# Altium PCB Sensor_Box_Hub_SAMD21.PCBDOC (part 1 of 3)
Units mm, origin at the board's own origin, x right, y up, seen from the top; angles counter-clockwise.
Board outline 33.7 x 72.8 mm, 2 copper layers (Top, Bot), stack 1.571 mm thick; 108 components, 111 nets, 446 pads, 221 vias.
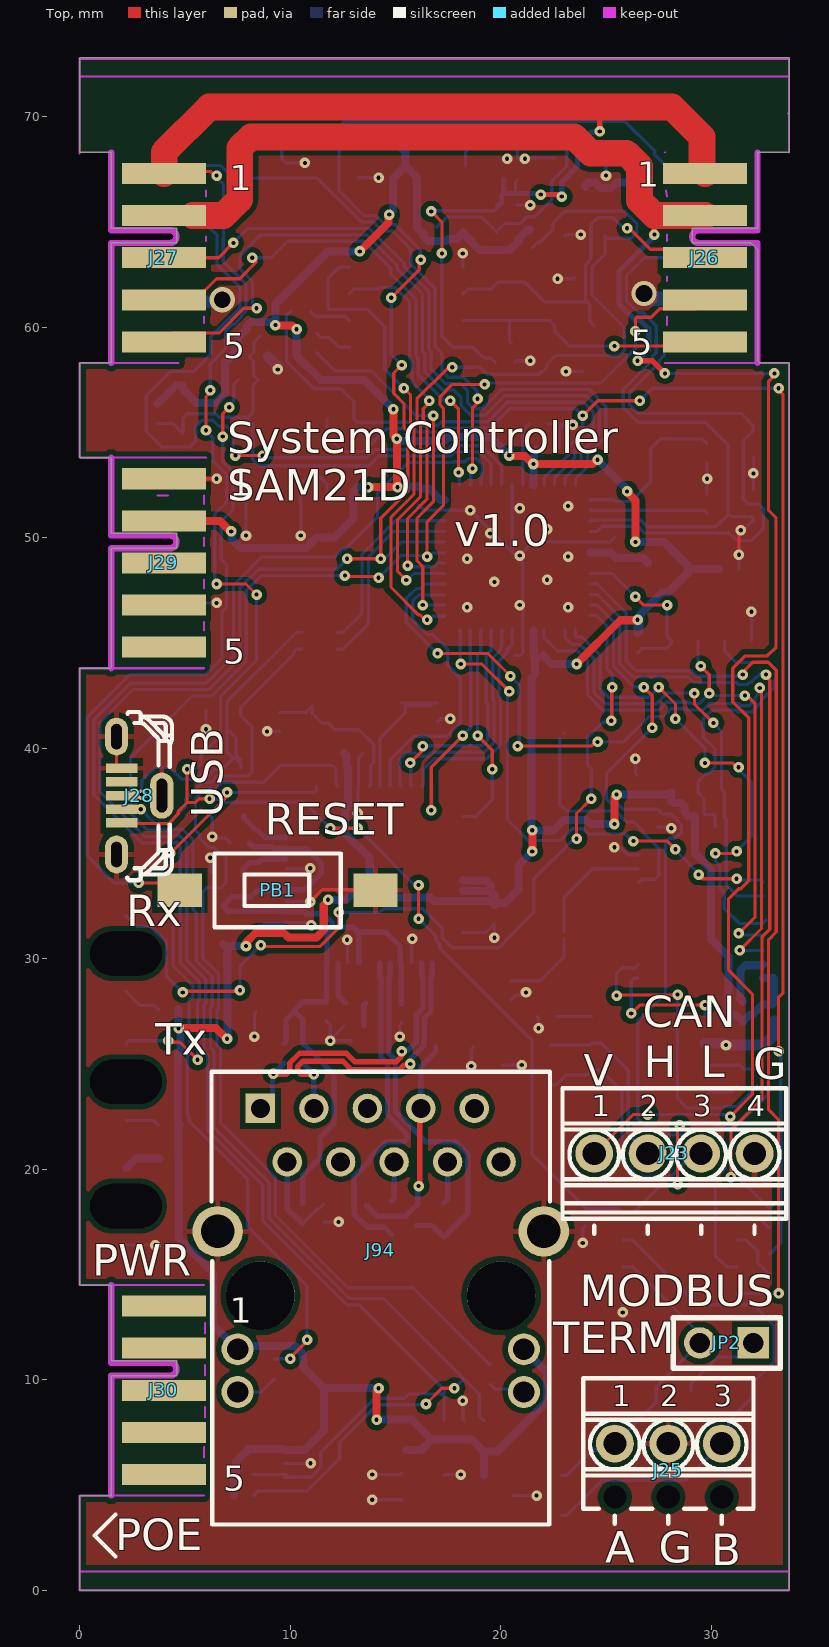
[diagram p0: Top view]
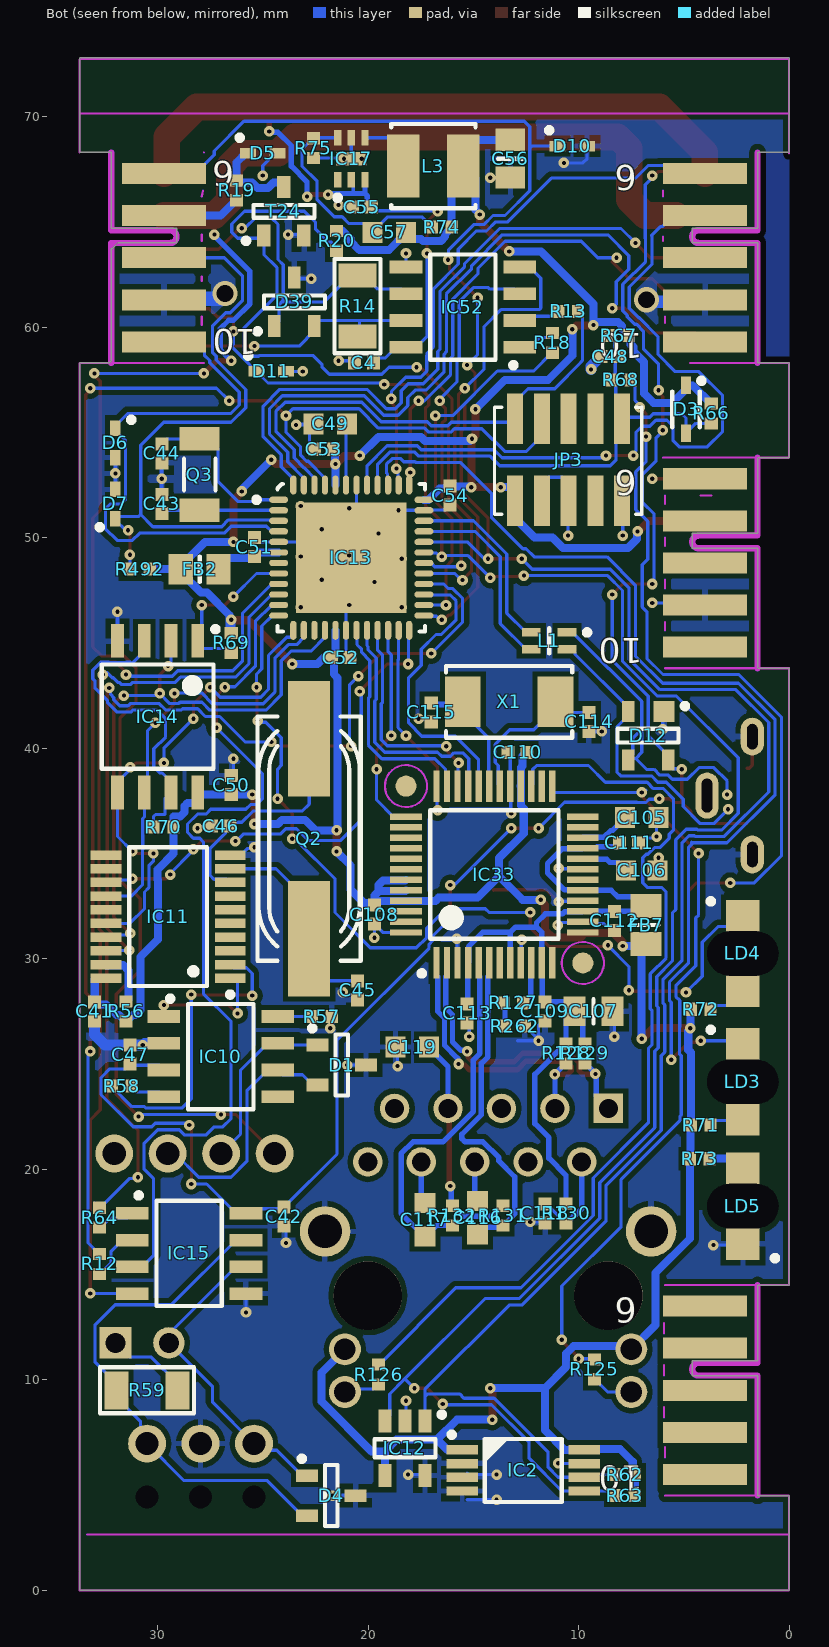
[diagram p1: Bot view, seen from below]
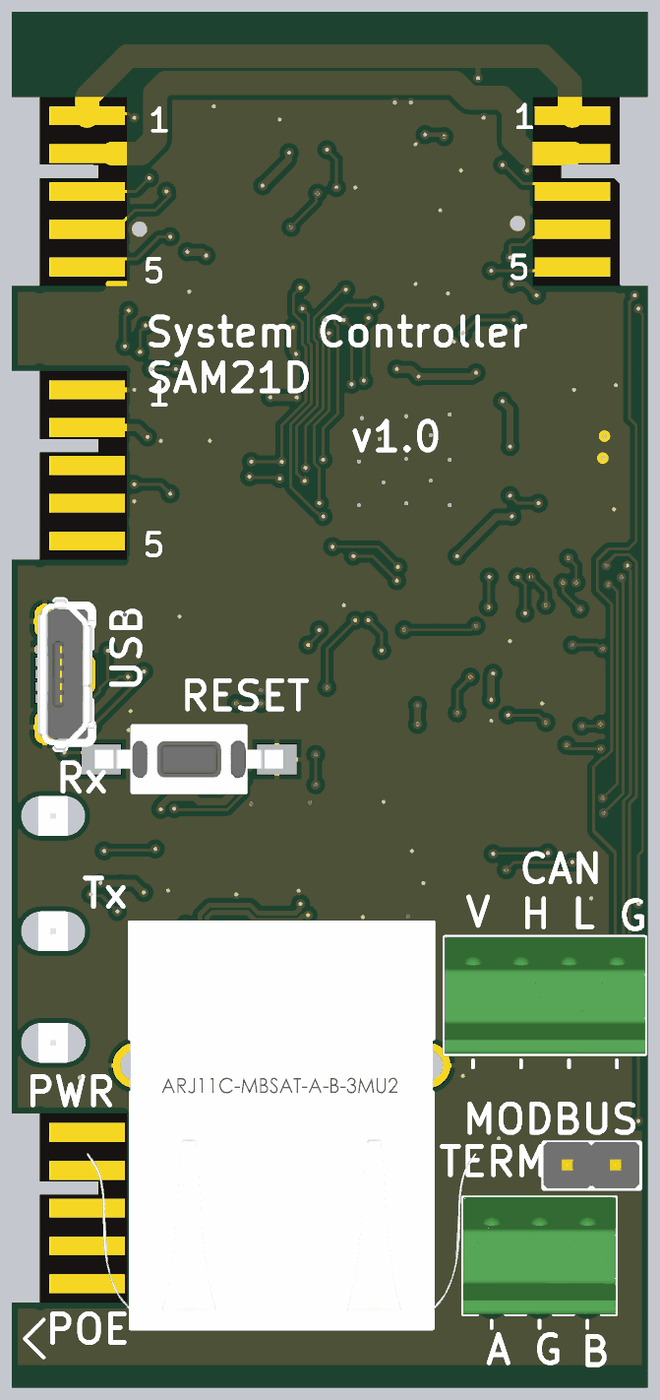
[diagram p3: 3D render of the assembled board from above, using the file's embedded part models]
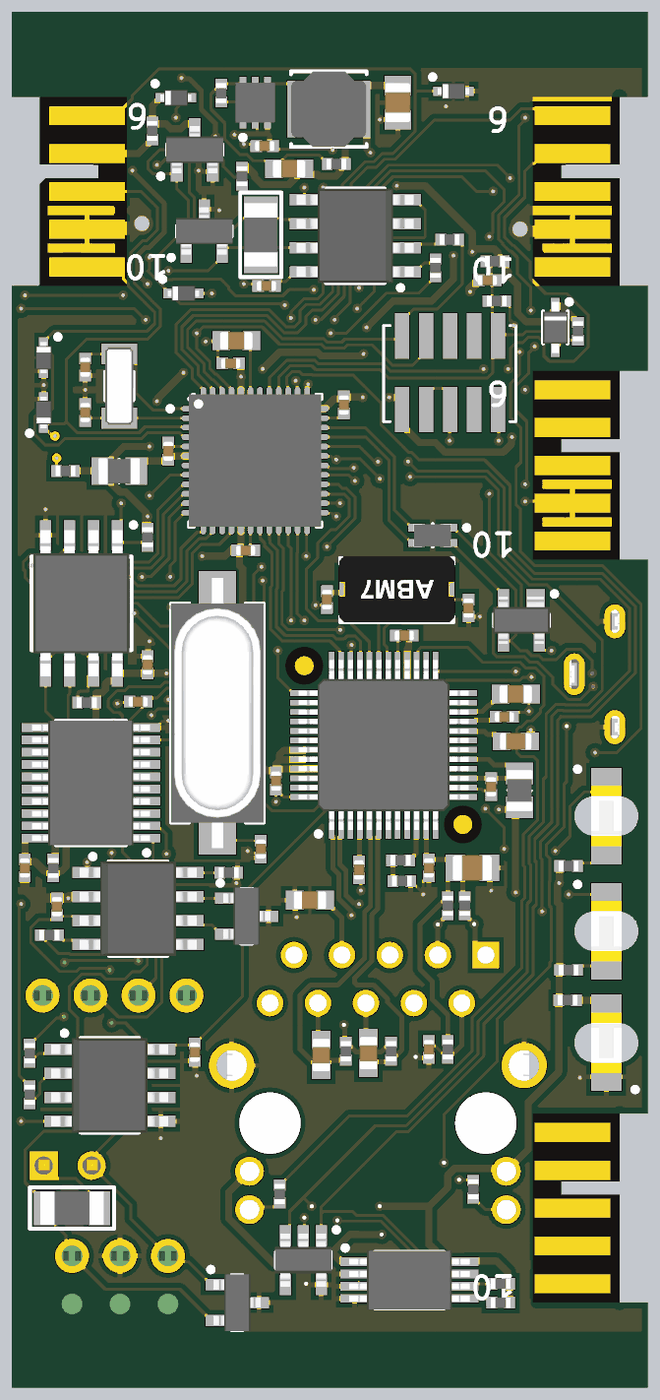
[diagram p4: 3D render of the assembled board from below, using the file's embedded part models]

## Layer stack, top to bottom
TopSolder: solder mask 0.0102, Solder Resist, Dk 3.5
Top: signal copper 0.0356
Dielectric1: core 1.5, FR-4, Dk 4.8
Bot: signal copper 0.0356
BottomSolder: solder mask 0.0102, Solder Resist, Dk 3.5

## Board outline
0,14.5 0.5,14.5 1.5,14.5 1.5,10.9 4.6,10.9 4.6,10.2 1.5,10.2 1.5,4.5 0,4.5 0,0 33.7,0 33.7,58.3 32.3,58.3 32.2,58.4 32.2,63.7 32.1,63.8 31.9,64 29.1,64 29.1,64.7 32.2,64.7 32.2,68.3 33.7,68.3 33.7,72.8 0,72.8 0,68.3 1.5,68.3 1.5,64.7 4.6,64.7 4.6,64 1.5,64 1.5,58.3 0,58.3 0,53.8 1.5,53.8 1.5,50.2 4.6,50.2 4.6,49.5 1.5,49.5 1.5,43.8 0,43.8 0,43.3

## Design rules (kind name [scope] priority, off if disabled: settings)
Clearance Clearance_DIFF [(InDifferentialPairClass('All Differential Pairs'))] p1: gap=0.127 ignorepadtopadclearanceinfootprint=FALSE except(0: Arc-Hole Track-Hole SMDPad-Hole THPad-Hole Via-Hole Fill-Hole Poly-Hole Region-Hole Text-Hole; 0.254: Arc-Poly Track-Poly SMDPad-Poly THPad-Poly Via-Poly Fill-Poly Poly-Poly Poly-Region Poly-Text)
Clearance [All] p2: gap=0.152 ignorepadtopadclearanceinfootprint=FALSE except(0.254: Arc-Poly Track-Poly SMDPad-Poly THPad-Poly Via-Poly Fill-Poly Poly-Poly)
DiffPairsRouting [All] p1: maxlimit=0.254 minlimit=0.127 mostfreqgap=0.127 toplayer_minwidth=0.127 toplayer_maxwidth=0.381 toplayer_prefwidth=0.254 bottomlayer_minwidth=0.127 bottomlayer_maxwidth=0.381 bottomlayer_prefwidth=0.254 maxuncoupledlength=12.7
FabricationTestPointUsage TestPointUsage [All] p1: valid=0 allowmultiple=FALSE
FabricationTestpoint Testpoint [All] p1: side=3 testpointundercomponent=TRUE minsize=1.016 maxsize=2.54 preferedsize=1.524 minholesize=0.508 maxholesize=1.016 preferedholesize=0.813 testpointgrid=0.025 allowsidetop=TRUE allowsidebottom=TRUE usegrid=TRUE gridtolerance=0
HoleSize [All] p1: absolutevalues=TRUE maxlimit=3.81 minlimit=0.025 maxpercent=80.000 minpercent=20.000
HoleToHoleClearance [All] p1: gap=0.025 allowstackedmicrovias=TRUE
MinimumSolderMaskSliver [All] p1: minsoldermaskwidth=0
PlaneClearance [All] p1: clearance=0.254
PlaneConnect [All] p1: planeconnectstyle=Direct reliefexpansion=0.508 reliefentries=4 reliefconductorwidth=0.254 reliefairgap=0.254
PolygonConnect PolygonConnect_pad [(InPadClass('All Pads'))] p1: connectstyle=Relief reliefconductorwidth=0.254 reliefentries=4 polygonreliefangle="90 Angle" airgapwidth=0.254
PolygonConnect [All] p2: connectstyle=Direct reliefconductorwidth=0.254 reliefentries=4 polygonreliefangle="45 Angle" airgapwidth=0.254
RoomDefinition U_W5500 [InComponentClass('U_W5500')] p1 off: confinementstyle=ConfineIn formatcopy=TRUE lockcomponents=FALSE outline 34.4,23.4 224.399,23.4 224.399,49.4 34.4,49.4
RoomDefinition Sensor_Box_Hub_SAMD21 [InComponentClass('Sensor_Box_Hub_SAMD21')] p2 off: confinementstyle=ConfineIn formatcopy=TRUE lockcomponents=FALSE outline 45.15,13.15 227.899,13.15 227.899,36.9 45.15,36.9
RoutingVias [All] p1: holewidth=0.2 width=0.5 viastyle="Through Hole" minholewidth=0.2 minwidth=0.5 maxholewidth=0.711 maxwidth=1.27
SilkToSilkClearance [All] p1: silktosilkclearance=0
SilkToSolderMaskClearance SilkscreenOverComponentPads [IsPad] p1: minsilkscreentomaskgap=0 clearancetoexposedcopper=TRUE
SolderMaskExpansion [All] p1: expansion=0.051
Width [All] p1: maxlimit=1.27 minlimit=0.127 preferedwidth=0.127
20 further rules are at their usual default settings.

## Classes and differential pairs
component class U_W5500: C105 C106 C107 C108 C109 C110 C111 C112 C113 C114 C115 C116 C117 C118 C119 FB7 IC33 J94 R125 R126 R127 R128 R129 R130 R131 R132 R262 X1
component class Sensor_Box_Hub_SAMD21: C4 C41 C42 C43 C44 C45 C46 C47 C48 C49 C50 C51 C52 C53 C54 C55 C56 C57 D1 D3 D4 D5 D6 D7 D10 D11 D12 D39 FB2 IC2 IC10 IC11 IC12 IC13 IC14 IC15 IC17 IC52 J23 J25 J26 J27 J28 J29 J30 JP2 JP3 L1 L3 LD3 LD4 LD5 PB1 Q2 Q3 R12 R13 R14 R18 R19 R20 R56 R57 R58 R59 R62 R63 R64 R66 R67 R68 R69 R70 R71 R72 R73 R74 R75 R492 T24
differential pair RJ45_TX: +RJ45_TX_P -RJ45_TX_N
differential pair RJ45_RX: +RJ45_RX_P -RJ45_RX_N
differential pair RJ45_RX_C: +RJ45_RX_C_P -RJ45_RX_C_N

## Components (designator, comment, footprint, x,y, rotation, side; value= is the part's Value field where it differs from the comment)
C4 "100nF" CAPC1005X55N 20.2,58.3 r0 bottom
C41 "100nF" CAPC1005X55N 33,27.5 r90 bottom
C42 "100nF" CAPC1005X55N 24,17.75 r90 bottom
C43 "12pF" CAPC1005X55N 29.8,51.6 r270 bottom
C44 "12pF" CAPC1005X55N 29.8,54 r270 bottom
C45 "18pF" CAPC1005X55N 20.5,28.5 r90 bottom
C46 "18pF" CAPC1005X55N 27,36.3 r180 bottom
C47 "100nF" CAPC1005X55N 31.3,25.45 r90 bottom
C48 "100nF" CAPC1005X55N 8.5,58.6 r0 bottom
C49 "1uF" CAPC1608X87N 21.8,55.4 r180 bottom
C50 "100nF" CAPC1005X55N 26.5,38.25 r90 bottom
C51 "100nF" CAPC1005X55N 25.4,49.55 r90 bottom
C52 "100nF" CAPC1005X55N 21.3,44.3 r180 bottom
C53 "100nF" CAPC1005X55N 22.1,54.2 r0 bottom
C54 "100nF" CAPC1005X55N 16.1,52 r270 bottom
C55 "1uF" CAPC1005X55N 20.3,65.7 r180 bottom
C56 "10uF" CAPC2012X135N 13.25,68 r270 bottom
C57 "68pF" CAPC1608X87N 19,64.5 r180 bottom
C105 "10nF" CAPC1608X87N 7,36.7 r0 bottom
C106 "4.7uF" CAPC1608X90N 7,34.2 r180 bottom
C107 "10uF" CAPC2012X135N 9.3,27.5 r180 bottom
C108 "100nF" CAPC1005X55N 19.7,32.1 r270 bottom
C109 "100nF" CAPC1005X55N 11.6,27.5 r270 bottom
C110 "100nF" CAPC1005X55N 12.9,39.8 r0 bottom
C111 "100nF" CAPC1005X55N 7.6,35.5 r180 bottom
C112 "100nF" CAPC1005X55N 8.3,31.8 r270 bottom
C113 "100nF" CAPC1005X55N 15.3,27.4 r270 bottom
C114 "22pF" CAPC1005X55N 9.5,41.25 r90 bottom
C115 "22pF" CAPC1005X55N 17,41.7 r90 bottom
C116 "10nF" CAPC1608X87N 14.8,17.7 r90 bottom
C117 "10nF" CAPC1608X87N 17.3,17.6 r90 bottom
C118 "100nF" CAPC1005X55N 11.6,17.9 r270 bottom
C119 "10nF" CAPC1608X87N 17.9,25.8 r180 bottom
D1 "PESD1CAN-UX" SOT95P237X112-3N 21.25,24.95 r180 bottom
D3 "1N4148WS" SODFL2512X100N 4.9,56.1 r270 bottom
D4 "SM712" SOT95P237X112-3N 21.75,4.5 r180 bottom
D5 "PESD3V3S1UB" SODFL1608X65N 25,68.25 r180 bottom
D6 "PESD3V3S1UB" SODFL1608X65N 32,54.5 r270 bottom
D7 "PESD3V3S1UB" SODFL1608X65N 32,51.6 r90 bottom
D10 "PESD3V3S1UB" SODFL1608X65N 10.3,68.6 r180 bottom
D11 "PESD3V3S1UB" SODFL1608X65N 24.6,57.9 r180 bottom
D12 "PRTR5V0U2X" SOT190P230X110-4N 6.7,40.6 r270 bottom
D39 "SM712" SOT95P237X112-3N 23.5,61.2 r90 bottom
FB2 "220R@100MHz" INDC2012X105N 28,48.5 r180 bottom
FB7 "220R@100MHz" INDC2012X105N 6.8,31.6 r90 bottom
IC2 "M24256-BRDW6" SOP65P640X120-8N 12.63,5.692 r180 bottom
IC10 "MCP2551-I/SN" SOIC127P600X175-8N 27,25.35 r180 bottom
IC11 "MCP2515-I/ST" SOP65P640X110-20N 29.5,32 r0 bottom
IC12 "24AA02E48T-I/OT" SOT95P280X145-5N 18.25,6.75 r270 bottom
IC13 "ATSAMD21G18A-MF" QFN50P700X700X100-49N-S525 20.8,49.05 r180 bottom
IC14 "AT25SF161-SSHD-B" SOIC127P790X216-8N 30,41.5 r270 bottom
IC15 "ST485ECDR" SOIC127P600X175-8N 28.5,16 r180 bottom
IC17 "AUR9705AGD" SON65P200X200X80-7N-R65X145 20.8,68 r90 bottom
IC33 "W5500" QFP50P900X900X160-48N 14,34 r90 bottom
IC52 "ST485ECDR" SOIC127P600X175-8N 15.5,60.95 r0 bottom
J23 "=Family" PHOENIX_1725672 28.25,20.75 r0 top
J25 "=Family" PHOENIX_1725669 27.96,6.97 r0 top
J26 "=Family" EDGE10T5B10_P200W1000L0F100X400 29.7,59.3 r90 top
J27 "=Family" EDGE10T1B6_P200W1000L0F100X400 4,67.3 r270 top locked
J28 "USB" MOLEX_105133-0011 2,37.75 r90 top
J29 "=Family" EDGE10T1B6_P200W1000L0F100X400 4,52.8 r270 top
J30 "=Family" EDGE10T1B6_P200W1000L0F100X400 4,13.5 r270 top
J94 "RJ45" ABRACON_ARJM11C7-114-BA-EW2 14.3,14 r0 top locked
JP2 "1798942 (goldpin 2x 2.54)" jump 32,11.75 r270 top
JP3 "PLHTD10S-TR-CV" PLHTD10S-TR-CV 7.3,53.7 r180 bottom
L1 "90R@100MHz" IND_MURATA_DLW21S 11.4,45.1 r0 bottom
L3 "2.2uH" IND_MURATA_LQH44PN_P0 16.9,67.65 r180 bottom
LD3 "Green" LED_KINGBRIGHT_KPTR3216 2.2,24.15 r90 bottom
LD4 "Green" LED_KINGBRIGHT_KPTR3216 2.2,30.25 r90 bottom
LD5 "Green" LED_KINGBRIGHT_KPTR3216 2.2,18.25 r270 bottom
PB1 "Push Button" PB_TYCO_FSMSM 9.4,33.25 r180 top
Q2 "20MHz" XTAL1160X490X430 22.8,35.7 r90 bottom
Q3 "32.768KHZ" XTAL_ABRACON_ABS09 28,53 r90 bottom
R12 "1k" RESC1005X40N 32.75,15.5 r90 bottom
R13 "1k" RESC1005X40N 10.5,60.75 r180 bottom
R14 "120R" 1206R 20.5,61 r90 bottom
R18 "1k" RESC1005X40N 11.25,59.25 r90 bottom
R19 "49R9" RESC1005X40N 26.25,66.5 r90 bottom
R20 "100k" RESC1005X40N 21.5,64.1 r90 bottom
R56 "10k" RESC1005X40N 31.5,27.5 r90 bottom
R57 "4k7" RESC1005X40N 22.2,27.25 r0 bottom
R58 "1k" RESC1005X40N 31.7,23.95 r0 bottom
R59 "120R" 1206R 30.5,9.5 r180 bottom
R62 "10k" RESC1005X40N 7.8,5.5 r180 bottom
R63 "10k" RESC1005X40N 7.8,4.5 r180 bottom
R64 "1k" RESC1005X40N 32.75,17.7 r270 bottom
R66 "10k" RESC1005X40N 3.7,55.9 r270 bottom
R67 "10k" RESC1005X40N 8.1,59.6 r180 bottom
R68 "49R9" RESC1005X40N 8,57.5 r180 bottom
R69 "10k" RESC1005X40N 26.5,45 r90 bottom
R70 "10k" RESC1005X40N 29.72,36.25 r180 bottom
R71 "1k" RESC1005X40N 4.2,22.1 r0 bottom
R72 "1k" RESC1005X40N 4.2,27.6 r0 bottom
R73 "1k" RESC1005X40N 4.25,20.5 r0 bottom
R74 "100k" RESC1005X40N 16.5,64.75 r180 bottom
R75 "22k" RESC1005X40N 22.6,68.5 r90 bottom
R125 "330" RESC1005X40N 9.25,10.5 r270 bottom
R126 "330" RESC1005X40N 19.5,10.25 r270 bottom
R127 "12k1" RESC1005X40N 13.1,27.9 r0 bottom
R128 "49R9" RESC1005X40N 10.6,25.5 r90 bottom
R129 "49R9" RESC1005X40N 9.7,25.5 r90 bottom
R130 "10" RESC1005X40N 10.6,17.9 r270 bottom
R131 "49R9" RESC1005X40N 13.6,17.8 r270 bottom
R132 "49R9" RESC1005X40N 16,17.8 r270 bottom
R262 "330" RESC1005X40N 13.027,26.804 r180 bottom
R492 "1k" RESC1005X40N 30.844,48.505 r0 bottom
T24 "BSS138LT1G" SOT95P240X110-3N 24,65.5 r90 bottom
X1 "QSDG25M000-TXC" XTAL_5.0*3.2 13.3,42.2 r0 bottom

## Footprints (in the part's own frame and the unit in brackets; to place one, negate y for a bottom-side part, rotate by r counter-clockwise, add the part's x,y. Pads: shape width x height; smd on the part's side, far side on the other; paste and mask are expansions set on the pad)
1206R [mm]
  rect 1.15x1.8 smd: 1(-1.45,0) 2(1.45,0)
  silkscreen extent -2.24,-1.09 2.24,1.09, body extent -1.67,-0.87 1.68,0.88, height 0.65
ABRACON_ARJM11C7-114-BA-EW2 [mm] "LAN Transformer, body 21.84x15.88mm"
  round 1.4 hole 0.9: 1(5.715,6.35) 2(4.445,8.89) 3(3.175,6.35) 4(1.905,8.89) 5(0.635,6.35) 6(-0.635,8.89) 7(-1.905,6.35) 8(-3.175,8.89) 9(-4.445,6.35)
  rect 1.4x1.4 hole 0.9: 10(-5.715,8.89)
  round 1.52 hole 1.02: L1(-6.8,-2.55) L2(-6.8,-4.58) L3(6.8,-2.55) L4(6.8,-4.58)
  round 3.25 hole 3.25 unplated: MH1(-5.715,0) MH2(5.715,0)
  round 2.4 hole 1.6: S1(-7.745,3.05) S2(7.745,3.05)
  silkscreen extent -8.04,-10.87 8.04,10.63, body extent -10.33,-10.87 10.33,10.63, height 16.15
CAPC1005X55N [mm] "Chip Capacitor, Body 1.0x0.55mm, IPC Medium Density"
  rect 0.62x0.62 smd: 1(-0.45,0) 2(0.45,0)
  body extent -0.52,-0.27 0.53,0.28, height 0.55
CAPC1608X87N [mm] "Chip Capacitor, Body 1.6x0.8mm IPC Medium Density"
  rect 0.95x1 smd: 1(-0.8,0) 2(0.8,0)
  body extent -0.87,-0.47 0.88,0.48, height 0.87
CAPC1608X90N [mm] "Chip Capacitor, Body 1.6x0.8mm IPC Medium Density"
  rect 0.95x0.95 smd: 1(-0.75,0) 2(0.75,0)
  body extent -0.85,-0.45 0.85,0.45, height 0.9
CAPC2012X135N [mm] "Chip Capacitor, Body 2.0x1.25mm, IPC Medium Density"
  rect 1.05x1.4 smd: 1(-0.9,0) 2(0.9,0)
  silkscreen extent 0,-0.58 0,0.58, body extent -1.05,-0.67 1.05,0.68, height 1.25
EDGE10T1B6_P200W1000L0F100X400 [mm] "10 contacts Board Edge Connector, First Left Top Pad 1, First Left Bottom Pad 2, Pitch 2mm, Length 0mm, Width 10mm, Finger Lenght 4mm, Finger Width 1mm"
  rect 1x4 smd paste-0.5: 1(0,0) 2(2,0) 3(4,0) 4(6,0) 5(8,0)
  rect 1x4 smd far side paste-0.5: 6(0,0) 7(2,0) 8(4,0) 9(6,0) 10(8,0)
  KeepOutLayer lines w0.3: 9,-2.5 3.3,-2.5 3.3,0.3 ccw(c3,0.3) 2.7,0.3 2.7,-2.5 -1,-2.5
EDGE10T5B10_P200W1000L0F100X400 [mm] "10 contacts Board Edge Connector, First Left Top Pad 5, First Left Bottom Pad 10, Pitch 2mm, Length 0mm, Width 10mm, Finger Lenght 4mm, Finger Width 1mm"
  rect 1x4 smd paste-0.5: 1(8,0) 2(6,0) 3(4,0) 4(2,0) 5(0,0)
  rect 1x4 smd far side paste-0.5: 6(8,0) 7(6,0) 8(4,0) 9(2,0) 10(0,0)
  KeepOutLayer lines w0.3: -1,-2.5 4.7,-2.5 4.7,0.3 cw(c5,0.3) 5.3,0.3 5.3,-2.5 9,-2.5
IND_MURATA_DLW21S [mm] "Common Mode Choke Coil, DLW21S Series - Body 2 x 1.2mm"
  rect 0.9x0.4 smd: 1(-0.85,-0.4) 2(0.85,-0.4) 3(0.85,0.4) 4(-0.85,0.4)
  silkscreen extent -1.92,-0.6 0,0.6, body extent -1,-0.6 1,0.6, height 1.4
IND_MURATA_LQH44PN_P0 [mm] "Wire Wound Ferrite Inductor for Power Lines, 4mm L X 4mm W X 1.65mm H, MURATA LQH44PN_P0 Series"
  rect 1.55x3 smd: 1(-1.425,0) 2(1.425,0)
  silkscreen extent -2,-2 2,2, body extent -2,-2 2,2, height 1.65
INDC2012X105N [mm] "Chip Inductor, EIA 0805, Metric 2012, Body 2.0x1.25mm, IPC Medium Density"
  rect 1.15x1.45 smd: 1(-0.9,0) 2(0.9,0)
  silkscreen extent 0,-0.6 0,0.6, body extent -1.1,-0.7 1.1,0.7, height 1.1
jump [mm]
  rect 1.5x1.5 hole 0.965: 1(0,0)
  round 1.5 hole 0.965: 2(0,-2.54)
  silkscreen extent -1.2,-3.81 1.2,1.27, body extent -1.26,-3.84 1.19,1.24, height 8
LED_KINGBRIGHT_KPTR3216 [mm] "Reverse Mount LED 3216, Hole 2.1x2.3mm 0.35mm Height"
  rect 1.5x1.6 smd: 1(1.8,0) 2(-1.8,0)
  oval 1.9x3.2 hole 2.1 slot 3.4 at 90 deg unplated mask+0.1: 3(0,0)
  silkscreen extent 2.35,1.4 2.6,1.65, body extent -1.6,-0.8 1.6,0.8, height 0.25
MOLEX_105133-0011 [mm] "0.65mm Pitch, Micro-USB Type B Surface Mounte Vertical Receptacle"
  rect 0.45x1.5 smd: 1(-1.3,0) 2(-0.65,0) 3(0,0) 4(0.65,0) 5(1.3,0)
  oval 1.8x1.1 hole 0.5 slot 1.2 at 0 deg: 6(-2.8,0.25) 6(2.8,0.25)
  oval 2.2x1.1 hole 0.5 slot 1.6 at 0 deg: 6(0,-1.9)
  silkscreen extent -4.03,-2.38 3.98,-0.26, body extent -4.02,-2.38 3.98,0.63, height 6.68
PB_TYCO_FSMSM [mm] "Body 3.5x6.0mm, Pushbutton Switch,  TYCO FSMSM Serie"
  rect 2.1x1.6 smd: 1(-4.65,0) 2(4.65,0)
  silkscreen extent -3,-1.75 3,1.75, body extent -5,-1.75 5,1.75, height 4.3
PHOENIX_1725669 [mm] "Micro PCB Terminal Block, Pitch 2.54mm, 3 Positions, Screw Connection"
  round 1.8 hole 1.1: 1(-2.54,0) 2(0,0) 3(2.54,0)
  round 0.5 hole 1.1 unplated mask+0.3: 4(-2.54,-2.54) 5(0,-2.54) 6(2.54,-2.54)
  silkscreen extent -4.04,-3.81 4.04,3.1, body extent -4.04,-3.1 4.04,3.1, height 8.5
PHOENIX_1725672 [mm] "Micro PCB Terminal Block, Pitch 2.54mm, 4 Positions, Screw Connection"
  round 1.8 hole 1.1: 1(-3.81,0) 2(-1.27,0) 3(1.27,0) 4(3.81,0)
  silkscreen extent -5.31,-3.81 5.31,3.1, body extent -5.31,-3.1 5.31,3.1, height 8.5
PLHTD10S-TR-CV [mm] "SMT 1.27 mm dual goldpin"
  rect 0.76x2.4 smd: 1(-5.715,-1.95) 2(-5.715,1.95) 3(-4.445,-1.95) 4(-4.445,1.95) 5(-3.175,-1.95) 6(-3.175,1.95) 7(-1.905,-1.95) 8(-1.905,1.95) 9(-0.635,-1.95) 10(-0.635,1.95)
  silkscreen extent -6.7,-2.58 0.3,2.5, body extent -6.5,-2.15 0.1,2.15, height 4.5
QFN50P700X700X100-49N-S525 [mm] "QFN, 0.50mm Pitch, Square; 48 Pin, 7.00mm L X 7.00mm W X 1mm H body (W/Thermal Tab 5.25mm X 5.25mm), IPC Medium Density"
  oval 0.9x0.3 smd: 1(-3.45,2.75) 2(-3.45,2.25) 3(-3.45,1.75) 4(-3.45,1.25) 5(-3.45,0.75) 6(-3.45,0.25) 7(-3.45,-0.25) 8(-3.45,-0.75) 9(-3.45,-1.25) 10(-3.45,-1.75) 11(-3.45,-2.25) 12(-3.45,-2.75) 25(3.45,-2.75) 26(3.45,-2.25) 27(3.45,-1.75) 28(3.45,-1.25) 29(3.45,-0.75) 30(3.45,-0.25) 31(3.45,0.25) 32(3.45,0.75) 33(3.45,1.25) 34(3.45,1.75) 35(3.45,2.25) 36(3.45,2.75)
  oval 0.3x0.9 smd: 13(-2.75,-3.45) 14(-2.25,-3.45) 15(-1.75,-3.45) 16(-1.25,-3.45) 17(-0.75,-3.45) 18(-0.25,-3.45) 19(0.25,-3.45) 20(0.75,-3.45) 21(1.25,-3.45) 22(1.75,-3.45) 23(2.25,-3.45) 24(2.75,-3.45) 37(2.75,3.45) 38(2.25,3.45) 39(1.75,3.45) 40(1.25,3.45) 41(0.75,3.45) 42(0.25,3.45) 43(-0.25,3.45) 44(-0.75,3.45) 45(-1.25,3.45) 46(-1.75,3.45) 47(-2.25,3.45) 48(-2.75,3.45)
  rect 5.25x5.25 smd: 49(0,0)
  silkscreen extent -4.63,-3.5 3.5,3.5, body extent -3.5,-3.5 3.5,3.5, height 1
QFP50P900X900X160-48N [mm] "QFP, 0.50mm pitch, square, 12 pin X 12 pin, 7.00mm X 7.00mm X 1.60mm Body, IPC Medium Density"
  rect 1.5x0.3 smd: 1(-4.2,2.75) 2(-4.2,2.25) 3(-4.2,1.75) 4(-4.2,1.25) 5(-4.2,0.75) 6(-4.2,0.25) 7(-4.2,-0.25) 8(-4.2,-0.75) 9(-4.2,-1.25) 10(-4.2,-1.75) 11(-4.2,-2.25) 12(-4.2,-2.75) 25(4.2,-2.75) 26(4.2,-2.25) 27(4.2,-1.75) 28(4.2,-1.25) 29(4.2,-0.75) 30(4.2,-0.25) 31(4.2,0.25) 32(4.2,0.75) 33(4.2,1.25) 34(4.2,1.75) 35(4.2,2.25) 36(4.2,2.75)
  rect 0.3x1.5 smd: 13(-2.75,-4.2) 14(-2.25,-4.2) 15(-1.75,-4.2) 16(-1.25,-4.2) 17(-0.75,-4.2) 18(-0.25,-4.2) 19(0.25,-4.2) 20(0.75,-4.2) 21(1.25,-4.2) 22(1.75,-4.2) 23(2.25,-4.2) 24(2.75,-4.2) 37(2.75,4.2) 38(2.25,4.2) 39(1.75,4.2) 40(1.25,4.2) 41(0.75,4.2) 42(0.25,4.2) 43(-0.25,4.2) 44(-0.75,4.2) 45(-1.25,4.2) 46(-1.75,4.2) 47(-2.25,4.2) 48(-2.75,4.2)
  round 1 smd paste-0.51 mask+0.5: FTG1(-4.2,-4.2) FTG2(4.2,4.2)
  Top keep-out circle w0.1: c-4.2,-4.2 r1
  Top keep-out circle w0.1: c4.2,4.2 r1
  silkscreen extent -4.82,-3.05 3.05,3.58, body extent -4.5,-4.5 4.5,4.5, height 1.6
RESC1005X40N [mm] "Chip Resistor, EIA 0402, Metric 1005, Body 1.0x0.5mm, IPC Medium Density"
  rect 0.58x0.62 smd: 1(-0.47,0) 2(0.47,0)
  body extent -0.52,-0.27 0.53,0.28, height 0.4
SODFL1608X65N [mm] "Ultra Small Outline Diode Flat Lead (SOD-523), Body; 1.2mm L X 0.8mm W X 0.65mm H, IPC Medium Density"
  rect 0.75x0.5 smd: 1(-0.7,0) 2(0.7,0)
  silkscreen extent -1.23,0.63 -0.98,0.87, body extent -0.82,-0.42 0.83,0.43, height 0.65
SODFL2512X100N [mm] "SODFL Diode; 1.70mm W X 1.25mm L X 1.00mm H body, IPC Medium Density"
  rect 0.84x0.46 smd: 1(-1.14,0) 2(1.14,0)
  silkscreen extent -1.47,-0.65 0.85,0.85, body extent -1.35,-0.65 1.35,0.65, height 1
SOIC127P600X175-8N [mm] "SOIC 8, Pitch 1.27mm - Body 4x5mm, IPC Medium Density"
  rect 1.55x0.6 smd: 1(-2.7,1.905) 2(-2.7,0.635) 3(-2.7,-0.635) 4(-2.7,-1.905) 5(2.7,-1.905) 6(2.7,-0.635) 7(2.7,0.635) 8(2.7,1.905)
  silkscreen extent -2.53,-2.5 1.55,2.88, body extent -3.1,-2.5 3.1,2.5, height 1.75
SOIC127P790X216-8N [mm] "SOIC, 1.27mm, Pitch; 8 Pin, 5.285mm W X 5.335mm L X 2.16mm H body, IPC Medium Density"
  rect 1.6x0.6 smd: 1(-3.6,1.905) 2(-3.6,0.635) 3(-3.6,-0.635) 4(-3.6,-1.905) 5(3.6,-1.905) 6(3.6,-0.635) 7(3.6,0.635) 8(3.6,1.905)
  silkscreen extent -4.27,-2.65 2.47,2.87, body extent -3.86,-2.54 3.86,2.54, height 2
SON65P200X200X80-7N-R65X145 [mm] "SON, 0.65mm Pitch, 6 Pin, 2.00mm W X 2.00mm L X 0.80mm H body (W/Thermal Tab 0.65mm X 1.45mm), IPC Medium Density"
  rect 0.75x0.35 smd: 1(-1,0.65) 2(-1,0) 3(-1,-0.65) 4(1,-0.65) 5(1,0) 6(1,0.65)
  rect 0.65x1.45 smd: 7(0,0)
  silkscreen extent -1.97,0.53 -1.73,0.78, body extent -1.05,-1.05 1.05,1.05, height 0.77
SOP65P640X110-20N [mm] "SOP, 20-Leads, Body 6.6x4.5mm (max), Pitch 0.65mm, IPC Medium Density"
  rect 1.45x0.45 smd: 1(-2.95,2.925) 2(-2.95,2.275) 3(-2.95,1.625) 4(-2.95,0.975) 5(-2.95,0.325) 6(-2.95,-0.325) 7(-2.95,-0.975) 8(-2.95,-1.625) 9(-2.95,-2.275) 10(-2.95,-2.925) 11(2.95,-2.925) 12(2.95,-2.275) 13(2.95,-1.625) 14(2.95,-0.975) 15(2.95,-0.325) 16(2.95,0.325) 17(2.95,0.975) 18(2.95,1.625) 19(2.95,2.275) 20(2.95,2.925)
  silkscreen extent -3.07,-3.3 1.85,3.82, body extent -3.12,-3.3 3.12,3.3, height 1.19
SOP65P640X120-8N [mm] "SOP, 0.65mm pitch; 8 pin, 4.40mm W X 3.00mm L X 1.20mm H body, IPC Medium Density"
  rect 1.5x0.45 smd: 1(-2.9,0.975) 2(-2.9,0.325) 3(-2.9,-0.325) 4(-2.9,-0.975) 5(2.9,-0.975) 6(2.9,-0.325) 7(2.9,0.325) 8(2.9,0.975)
  silkscreen extent -3.53,-1.5 1.83,1.82, body extent -3.2,-1.55 3.2,1.55, height 1.2
SOT95P237X112-3N [mm] "SOT, 0.95mm, pitch; 3 pin,1.30mm W X 2.92mm L X 1.12mm H body, IPC Medium Density"
  rect 1.05x0.6 smd: 1(-1.15,0.95) 2(-1.15,-0.95) 3(1.15,0)
  silkscreen extent -1.53,-1.45 0.3,1.87, body extent -1.25,-1.5 1.25,1.5, height 1.1
SOT95P240X110-3N [mm] "SOT23 3-Leads, Pitch 0.95mm, Body 1.3x2.9mm, IPC Medium Density"
  rect 1.05x0.65 smd: 1(-1.15,0.95) 2(-1.15,-0.95) 3(1.15,0)
  silkscreen extent -1.52,-1.45 0.3,1.92, body extent -1.25,-1.5 1.25,1.5, height 1.1
SOT95P280X145-5N [mm] "SOT, 0.95mm pitch; 5 pin, 1.60mm W X 2.90mm L X 1.45mm H body, IPC Medium Density"
  rect 1.1x0.6 smd: 1(-1.3,0.95) 2(-1.3,0) 3(-1.3,-0.95) 4(1.3,-0.95) 5(1.3,0.95)
  silkscreen extent -1.72,-1.45 0.43,1.87, body extent -1.4,-1.5 1.4,1.5, height 1.45
SOT190P230X110-4N [mm] "SOT143, SOT, 1.90mm Pitch; 4 Pin, 1.30mm W X 2.90mm L X 1.10mm H body, IPC Medium Density"
  rect 1x1 smd: 1(-1.15,0.75)
  rect 1x0.6 smd: 2(-1.15,-0.95) 3(1.15,-0.95) 4(1.15,0.95)
  silkscreen extent -1.52,-1.45 0.33,1.87, body extent -1.25,-1.5 1.25,1.5, height 1.1
XTAL1160X490X430 [mm] "HC49/4H SMX Case, SMD Cristal, Body 11.6x4.9mm"
  rect 5.5x2 smd: 1(-4.75,0) 2(4.75,0)
  silkscreen extent -5.8,-2.45 5.8,2.45, body extent -7.15,-2.45 7.15,2.45, height 4.3
XTAL_5.0*3.2 [mm]
  rect 1.7x2.4 smd: 1(-2.2,0) 2(2.2,0)
  silkscreen extent -3,-1.7 3,1.7, body extent -3.05,-1.8 3.05,1.7, height 1.44
XTAL_ABRACON_ABS09 [mm] "2 Pins, 4.1x1.5mm, SMD Low Profile Crystal, ABS09 Series"
  rect 1.1x1.9 smd: 1(-1.7,0) 2(1.7,0)
  silkscreen extent -0.75,-0.75 0.75,0.75, body extent -2.05,-0.75 2.05,0.75, height 0.9

## Part data
C4 C47 C48 C50 C51 C52 C53 C54 C108 C109 C110 C111 C112 C113 C118: library part CC0402_100NF_16V_10%_X7R, "Non-polarised capacitor", Case=0402, Manufacturer=GENERIC, Manufacturer1 ComponentHeight=0.55mm, Manufacturer1 Example=MURATA, Manufacturer1 Part Number=GRM155R71C104KA88D, Tolerance=±10%, Voltage=16V, Author="CERN DEM JLC", Component Type=Standard, CreateDate=05.12.2013, HelpURL=\\cern.ch\dfs\Applications\Altium\Datasheets\CC0402_X7R_MURATA_GRM.pdf, LatestRevisionDate=03.12.2007, Manufacturer Part Number=CC0402_100NF_16V_10%_X7R, Mounted=Yes, Part Description="SMD Multilayer Chip Ceramic Capacitor", Part Number=CC0402_100NF_16V_10%_X7R, Pin Count=2, Sense=No, SMD=Yes, Socket=No, Status="Not Recommended", TC=X7R
C41 C42: library part CC0402_100NF_16V_10%_X5R, "Non-polarised capacitor", Case=0402, Manufacturer=GENERIC, Manufacturer1 ComponentHeight=0.55mm, Manufacturer1 Example=MURATA, Manufacturer1 Part Number=GRM155R61C104KA88D, Tolerance=±10%, Voltage=16V, Author="CERN DEM JLC", Component Type=Standard, CreateDate=10.12.2013, HelpURL=\\cern.ch\dfs\Applications\Altium\Datasheets\CC0402_X5R_MURATA_GRM.pdf, LatestRevisionDate=10.12.2013, Manufacturer Part Number=CC0402_100NF_16V_10%_X5R, Mounted=Yes, Part Description="SMD Multilayer Chip Ceramic Capacitor", Part Number=CC0402_100NF_16V_10%_X5R, Pin Count=2, Sense=No, SMD=Yes, Socket=No, Status=None, TC=X5R
C43 C44: library part CC0402_12PF_50V_5%_C0G, "Non-polarised capacitor", Case=0402, Manufacturer=GENERIC, Manufacturer1 ComponentHeight=0.55mm, Manufacturer1 Example=KEMET, Manufacturer1 Part Number=C0402C120J5GACTU, Tolerance=±5%, Voltage=50V, Author="CERN DEM JLC", Component Type=Standard, CreateDate=04.10.2016, HelpURL="\\cern.ch\dfs\Applications\Altium\Datasheets\CC0805_C0G_KEMET_(Commercial Grade).pdf", LatestRevisionDate=04.10.2016, Manufacturer Part Number=CC0402_12PF_50V_5%_C0G, Mounted=Yes, Part Description="SMD Multilayer Chip Ceramic Capacitor", Part Number=CC0402_12PF_50V_5%_C0G, Pin Count=2, Sense=No, SMD=Yes, Socket=No, Status=Preferred, TC=C0G/NP0
C45 C46: library part CC0402_18PF_50V_5%_C0G, "Non-polarised capacitor", Case=0402, Manufacturer=GENERIC, Manufacturer1 ComponentHeight=0.55mm, Manufacturer1 Example=KEMET, Manufacturer1 Part Number=C0402C180J5GACTU, Tolerance=±5%, Voltage=50V, Author="CERN DEM JLC", Component Type=Standard, CreateDate=04.10.2016, HelpURL="\\cern.ch\dfs\Applications\Altium\Datasheets\CC0805_C0G_KEMET_(Commercial Grade).pdf", LatestRevisionDate=04.10.2016, Manufacturer Part Number=CC0402_18PF_50V_5%_C0G, Mounted=Yes, Part Description="SMD Multilayer Chip Ceramic Capacitor", Part Number=CC0402_18PF_50V_5%_C0G, Pin Count=2, Sense=No, SMD=Yes, Socket=No, Status=Preferred, TC=C0G/NP0
C49: library part CC0603_1UF_16V_10%_X7R, "Non-polarised capacitor", Case=0603, Manufacturer=GENERIC, Manufacturer1 ComponentHeight=0.9mm, Manufacturer1 Example="YAGEO PHYCOMP", Manufacturer1 Part Number=223878615663, Manufacturer Part Number=CC0603_1uF_16V_10%_X7R, Tolerance=±10%, Voltage=16V, Author="CERN DEM JLC", Component Type=Standard, CreateDate=03.12.2007, HelpURL=\\cern.ch\dfs\Applications\Altium\Datasheets\CC0603_X7R_PHYCOMP.pdf, LatestRevisionDate=17.04.2015, Mounted=Yes, Part Description="SMD Multilayer Chip Ceramic Capacitor", Part Number=CC0603_1UF_16V_10%_X7R, Pin Count=2, Sense=No, SMD=Yes, Socket=No, Status=None, TC=X7R
C55: library part CC0402_1UF_16V_10%_X5R, "Non-polarised capacitor", Case=0402, Manufacturer=GENERIC, Manufacturer1 ComponentHeight=0.55mm, Manufacturer1 Example=TDK, Manufacturer1 Part Number=C1005X5R1C105KT, Tolerance=±10%, Voltage=16V, Author="CERN DEM JLC", Component Type=Standard, CreateDate=25.10.2012, HelpURL=\\cern.ch\dfs\Applications\Altium\Datasheets\CC0402_X5R_TDK_C.pdf, LatestRevisionDate=25.10.2012, Manufacturer Part Number=CC0402_1UF_16V_10%_X5R, Mounted=Yes, Part Description="SMD Multilayer Chip Ceramic Capacitor", Part Number=CC0402_1UF_16V_10%_X5R, Pin Count=2, Sense=No, SMD=Yes, Socket=No, Status=Preferred, TC=X5R
C56 C107: library part CC0805_10UF_16V_10%_X5R, "Non-polarised capacitor", Case=0805, Manufacturer=GENERIC, Manufacturer1 ComponentHeight=1.4mm, Manufacturer1 Example=KEMET, Manufacturer1 Part Number=C0805C106K4PAC, Tolerance=±10%, Voltage=16V, Author="CERN DEM JLC", Component Type=Standard, CreateDate=03.12.2007, HelpURL=\\cern.ch\dfs\Applications\Altium\Datasheets\CC1206_X5R_KEMET.pdf, LatestRevisionDate=03.12.2007, Manufacturer Part Number=CC0805_10UF_16V_10%_X5R, Mounted=Yes, Part Description="SMD Multilayer Chip Ceramic Capacitor", Part Number=CC0805_10UF_16V_10%_X5R, Pin Count=2, Sense=No, SMD=Yes, Socket=No, Status=Preferred, TC=X5R
C57: library part CC0603_68PF_50V_5%_NP0, "Non-polarised capacitor", Case=0603, Manufacturer=GENERIC, Manufacturer1 ComponentHeight=0.87mm, Manufacturer1 Example=PHYCOMP, Manufacturer1 Part Number=223886715689, Tolerance=±5%, Voltage=50V, Author="CERN DEM JLC", Component Type=Standard, CreateDate=03.12.2007, HelpURL=\\cern.ch\dfs\Applications\Altium\Datasheets\CC0603_NP0_PHYCOMP.pdf, LatestRevisionDate=03.12.2007, Manufacturer Part Number=CC0603_68PF_50V_5%_NP0, Mounted=Yes, Part Description="SMD Multilayer Chip Ceramic Capacitor", Part Number=CC0603_68PF_50V_5%_NP0, Pin Count=2, Sense=No, SMD=Yes, Socket=No, Status=Preferred, TC=C0G/NP0
C105 C116 C117 C119: library part CC0603_10NF_50V_5%_C0G, "Non-polarised capacitor", Case=0603, Manufacturer=GENERIC, Manufacturer1 ComponentHeight=0.9mm, Manufacturer1 Example=TDK, Manufacturer1 Part Number=C1608C0G1H103J080AA, Tolerance=±5%, Voltage=50V, Author="CERN DEM JLC", Component Type=Standard, CreateDate=10.12.2014, HelpURL=\\cern.ch\dfs\Applications\Altium\Datasheets\CC0603_C0G_TDK_C.pdf, LatestRevisionDate=10.12.2014, Manufacturer Part Number=CC0603_10NF_50V_5%_C0G, Mounted=Yes, Part Description="SMD Multilayer Chip Ceramic Capacitor", Part Number=CC0603_10NF_50V_5%_C0G, Pin Count=2, Sense=No, SMD=Yes, Socket=No, Status=Preferred, TC=C0G/NP0
C106: library part CC0603_4.7UF_25V_10%_X5R, "Non-polarised capacitor", Case=0603, Manufacturer=GENERIC, Manufacturer1 ComponentHeight=0.95mm, Manufacturer1 Example=MURATA, Manufacturer1 Part Number=GRM188R61E475KE11D, Tolerance=±10%, Voltage=25V, Author="CERN DEM JLC", Component Type=Standard, CreateDate=10.11.2014, HelpURL=\\cern.ch\dfs\Applications\Altium\Datasheets\CC0603_MURATA_GRM188R61E475KE11D.pdf, LatestRevisionDate=10.11.2014, Manufacturer Part Number=CC0603_4.7UF_25V_10%_X5R, Mounted=Yes, Part Description="SMD Multilayer Chip Ceramic Capacitor", Part Number=CC0603_4.7UF_25V_10%_X5R, Pin Count=2, Sense=No, SMD=Yes, Socket=No, Status=None, TC=X5R
C114 C115: library part CC0402_22PF_50V_5%_NP0, "Non-polarised capacitor", Case=0402, Manufacturer=GENERIC, Manufacturer1 ComponentHeight=0.55mm, Manufacturer1 Example=PHYCOMP, Manufacturer1 Part Number=223886915229, Tolerance=±5%, Voltage=50V, Author="CERN DEM JLC", Component Type=Standard, CreateDate=2007-12-03, HelpURL=\\cern.ch\dfs\Applications\Altium\Datasheets\CC0402_NP0_PHYCOMP.pdf, LatestRevisionDate=2007-12-03, Manufacturer Part Number=CC0402_22PF_50V_5%_NP0, Mounted=Yes, Part Description="SMD Multilayer Chip Ceramic Capacitor", Part Number=CC0402_22PF_50V_5%_NP0, Pin Count=2, SMD=Yes, Socket=No, Status="Not Recommended", Table="Capacitors SMD", TC=NP0
D1: "TVS Diode for CAN", Case=SOT-23, Manufacturer=Nexperia, Power=400W, Voltage=24V, Author="CERN DEM JLC", Bonding=No, ComponentHeight=1.12mm, Component Type=Standard, CreateDate=03.09.2014, Device=PESD1CAN-UX, HelpURL=\\cern.ch\dfs\Applications\Altium\Datasheets\SM712.TCT.pdf, LatestRevisionDate=13.01.2015, Manufacturer Part Number=PESD1CAN-UX, Mounted=Yes, PackageDescription="SOT, 0.95mm, pitch; 3 pin,1.30mm W X 2.92mm L X 1.12mm H body, IPC Medium Density", Part Description="TVS Diode for CAN", Part Number=PESD1CAN-UX, Pin Count=3, PressFit=No, Sense=No, SMD=Yes, Socket=No
D3: "Diode", Case=SOD-323F, Manufacturer="FAIRCHILD SEMICONDUCTOR", Power=150mA, Voltage=75V, Author="CERN DEM JLC", Bonding=No, ComponentHeight=1mm, Component Type=Standard, CreateDate=12.05.2011, Device=1N4148WS, HelpURL=\\cern.ch\dfs\Applications\Altium\Datasheets\1N4148WS.pdf, LatestRevisionDate=12.05.2011, Manufacturer Part Number=1N4148WS, Mounted=Yes, PackageDescription="SODFL Diode; 1.70mm W X 1.25mm L X 1.00mm H body, IPC Medium Density", Part Description="Small Signal Diodes", Part Number=1N4148WS, Pin Count=2, PressFit=No, Sense=No, SMD=Yes, Socket=No
D4 D39: "Asymmetrical TVS Diode for Extended Common-Mode RS-485", Case=SOT-23, Manufacturer=SEMTECH, Power=400W, Voltage=12V/-7V, Author="CERN DEM JLC", Bonding=No, ComponentHeight=1.12mm, Component Type=Standard, CreateDate=23.04.2012, Device=SM712, HelpURL=\\cern.ch\dfs\Applications\Altium\Datasheets\SM712.pdf, LatestRevisionDate=23.04.2012, Manufacturer Part Number=SM712, Mounted=Yes, PackageDescription="SOT, 0.95mm, pitch; 3 pin,1.30mm W X 2.92mm L X 1.12mm H body, IPC Medium Density", Part Description="Asymmetrical TVS Diode for Extended Common-Mode RS-485", Part Number=SM712, Pin Count=3, PressFit=No, Sense=No, SMD=Yes, Socket=No, Status=Obsolete
D5 D6 D7 D10 D11: "ESD protection diode", Case=SOD523, Manufacturer="NXP SEMICONDUCTORS", Power=330W, Voltage=3V3, Author="CERN DEM JLC", Bonding=No, ComponentHeight=0.65mm, Component Type=Standard, CreateDate=29.11.2012, Device=PESD3V3S1UB, HelpURL=\\cern.ch\dfs\Applications\Altium\Datasheets\PESD3V3S1UB.pdf, LatestRevisionDate=29.11.2012, Manufacturer Part Number=PESD3V3S1UB, Mounted=Yes, PackageDescription="Ultra Small Outline Diode Flat Lead (SOD-523), Body; 1.2mm L X 0.8mm W X 0.65mm H, IPC Medium Density", Part Description="ESD protection diode (23kV)", Part Number=PESD3V3S1UB, Pin Count=2, PressFit=No, Sense=No, SMD=Yes, Socket=No
D12: "Ultra Low Capacitance Double Rail-to-Rail ESD Protection Diode", Case=SOT143B, Manufacturer="NXP SEMICONDUCTORS", Voltage=5.5V, Author="CERN DEM JLC", Bonding=No, ComponentHeight=1.1mm, Component Type=Standard, CreateDate=2011-03-22, Device=PRTR5V0U2X, HelpURL=\\cern.ch\dfs\Applications\Altium\Datasheets\PRTR5V0U2X.pdf, LatestRevisionDate=2011-03-22, Manufacturer Part Number=PRTR5V0U2X, Mounted=Yes, PackageDescription="SOT143B, SOT, 1.90mm Pitch; 4 Pin, 1.30mm W X 2.90mm L X 1.10mm H body, IPC Medium Density", Part Description="Ultra Low Capacitance (1pF) Double Rail-to-Rail ESD Protection Diode (8kV)", Part Number=PRTR5V0U2X, Pin Count=4, PressFit=No, SMD=Yes, Socket=No, Table=Diodes
FB2 FB7: library part IND0805_MURATA_BLM21PG221SN1D, "Inductor", Case=0805, Manufacturer=MURATA, Manufacturer Part Number=BLM21PG221SN1D, Power=2A, Resistance=0.05R, Tolerance=±25%, Author="CERN DEM JLC", ComponentHeight=1.05mm, Component Type=Standard, CreateDate=2010-01-25, HelpURL=\\cern.ch\dfs\Applications\Altium\Datasheets\IND0402_MURATA_BLM21P.pdf, LatestRevisionDate=2010-01-25, Mounted=Yes, Part Description="SMD EMIFIL Suppression Chip Ferrite Bead", Part Number=IND0805_MURATA_BLM21PG221SN1D, Pin Count=2, SMD=Yes, Socket=No, Status=None, Table="Inductors SMD"
IC2: "256-Kbit Serial I²C Bus EEPROM", Case=TSSOP8, Manufacturer="ST MICROELECTRONICS", Part Number=M24256-BRDW6P, Author="CERN DEM MR", Bonding=No, ComponentHeight=1.2mm, Component Type=Standard, CreateDate=17.03.2016, Device=M24256-BRDW6, HelpURL=\\cern.ch\dfs\Applications\Altium\Datasheets\M24256-BRDW6P.pdf, LatestRevisionDate=17.03.2016, Manufacturer Part Number=M24256-BRDW6, Mounted=Yes, PackageDescription="SOP, 0.65mm pitch; 8 pin, 4.40mm W X 3.00mm L X 1.20mm H body, IPC Medium Density", Part Description="256-Kbit Serial I²C Bus EEPROM", Pin Count=8, PressFit=No, Sense=No, SMD=Yes, Socket=No
IC10: "High-Speed CAN Transceiver, 8-Pin SOIC, Industrial Temperature", Case=SOIC8, Manufacturer="MICROCHIP TECHNOLOGY", Author=GK, Bonding=No, ComponentHeight=1.75mm, Component Type=Standard, CreateDate=07.09.2016, Device=MCP2551-I/SN, LatestRevisionDate=07.09.2016, Manufacturer Part Number=MCP2551-I/SN, Mounted=Yes, PackageDescription="SOIC 8, Pitch 1.27mm - Body 4x5mm, IPC Medium Density", Part Description="High-Speed CAN Transceiver", Part Number=MCP2551-I/SN, Pin Count=8, PressFit=No, Sense=No, SMD=Yes, Socket=No
IC11: library part IFC_MCP2515_TSSOP, "CAN Controller With SPI nterface", Case=TSSOP20, Manufacturer=Microchip, Manufacturer Part Number=MCP2515T-I/ST, Component Type=Standard, Device=MCP2515, Mounted=Yes, PackageDescription="TSSOP 20, Pitch 0.65mm - Body 4.5x6.5mm, IPC Medium Density", Part Description="Stand-Alone CAN Controller with SPI Interface", Part Number=MCP2515T-I/ST, Pin Count=20, SMD=Yes
IC12: "1.7V-5.5V, 2K I2C Serial EEPROM With EUI-48 Node Identity", Case=SOT23-5, Manufacturer="MICROCHIP TECHNOLOGY", Author="CERN DEM MR", Bonding=No, ComponentHeight=1.45mm, Component Type=Standard, CreateDate=31.03.2016, Device=24AA02E48T-I/OT, HelpURL=\\cern.ch\dfs\Applications\Altium\Datasheets\24AA02E48T-I-OT.pdf, LatestRevisionDate=31.03.2016, Manufacturer Part Number=24AA02E48T-I/OT, Mounted=Yes, PackageDescription="SOT, 0.95mm pitch; 5 pin, 1.60mm W X 2.90mm L X 1.45mm H body, IPC Medium Density", Part Description="1.7V-5.5V, 2K I2C Serial EEPROM With EUI-48 Node Identity", Part Number=24AA02E48T-I/OT, Pin Count=5, PressFit=No, Sense=No, SMD=Yes, Socket=No
IC13: "32-bit ARM®-based Cortex®-M0+ core Microcontroller, 1.62V to 3.6V, 48MHz, 256KB Flash, 32KB of SRAM, 48 QFN, Industrial Grade (-40°C to 125°C)", Case=QFN48, Manufacturer=MICROCHIP, Author="CERN DEM BC", Bonding=No, ComponentHeight=1mm, Component Type=Standard, CreateDate=23.01.2018, Device=ATSAMD21G18A-MF, HelpURL=\\cern.ch\dfs\Applications\Altium\Datasheets\ATSAMD21G18A-MF.pdf, LatestRevisionDate=23.01.2018, Manufacturer Part Number=ATSAMD21G18A-MF, Mounted=Yes, PackageDescription="QFN, 0.50mm Pitch, Square; 48 Pin, 7.00mm L X 7.00mm W X 1mm H Body (W/Thermal Tab 5.25mm X 5.25mm), IPC Medium Density", Part Description="32-bit ARM®-based Cortex®-M0+ core Microcontroller, 1.62V to 3.6V, 48MHz, 256KB Flash, 32KB SRAM, 48 QFN, Temperature Range -40°C to 125°C", Part Number=ATSAMD21G18A-MF, Pin Count=49, PressFit=No, Sense=No, SMD=Yes, Socket=No
IC14: "16Mb, 3V, Multiple I/O Serial NOR Flash Memory", Case=SOIC8, Author=GK, Bonding=No, ComponentHeight=2.16mm, Component Type=Standard, CreateDate=28.11.2011, Device=AT25SF161-SSHD-B, HelpURL=\\cern.ch\dfs\Applications\Altium\Datasheets\N25Q128A13ESE40.pdf, LatestRevisionDate=30.07.2015, Manufacturer Part Number=AT25SF161-SSHD-B, Mounted=Yes, PackageDescription="SOIC, 1.27mm Pitch; 8 Pin, 5.285mm W X 5.335mm L X 2.16mm H body, IPC Medium Density", Part Description="16Mb, 2.7 to 3.6V, SPI Flash Memory", Part Number=AT25SF161-SSHD-B, Pin Count=8, PressFit=No, Sense=No, SMD=Yes, Socket=No
IC15 IC52: "±15kV ESD-Protected, Low Power  RS-485/RS-422 Transceiver", Case=SOIC8, Manufacturer="ST MICROELECTRONICS", Author="CERN DEM MR", Bonding=No, ComponentHeight=1.75mm, Component Type=Standard, CreateDate=15.02.2018, Device=ST485ECDR, HelpURL=\\cern.ch\dfs\Applications\Altium\Datasheets\ST485ECDR.pdf, LatestRevisionDate=15.02.2018, Manufacturer Part Number=ST485ECDR, Mounted=Yes, PackageDescription="SOIC 8, Pitch 1.27mm - Body 4x5mm, IPC Medium Density", Part Description="±15kV ESD-Protected, Low Power  RS-485/RS-422 Transceiver", Part Number=ST485ECDR, Pin Count=8, PressFit=No, Sense=No, SMD=Yes, Socket=No
IC17: "0V to 6V Input, 1A, 1.5MHz, Step-Down DC-DC Converter", Case=SON6, Manufacturer="DIODES INCORPORATED", Author="CERN DEM MR", Bonding=No, ComponentHeight=0.8mm, Component Type=Standard, CreateDate=15.02.2018, Device=AUR9705AGD, HelpURL=\\cern.ch\dfs\Applications\Altium\Datasheets\AUR9705AGD.pdf, LatestRevisionDate=15.02.2018, Manufacturer Part Number=AUR9705AGD, Mounted=Yes, PackageDescription="SON, 0.65mm Pitch, 6 Pin, 2.00mm W X 2.00mm L X 0.80mm H body (W/Thermal Tab 0.65mm X 1.45mm), IPC Medium Density", Part Description="0V to 6V Input, 1A, 1.5MHz, Step-Down DC-DC Converter", Part Number=AUR9705AGD, Pin Count=7, PressFit=No, Sense=No, SMD=Yes, Socket=No
IC33: "iEthernet W5500 TCP/IP Performance and High Speed SPI Ethernet Controller", Case=QFP48, Manufacturer=WIZNET, Author="CERN DEM MR", Bonding=No, ComponentHeight=1.6mm, Component Type=Standard, CreateDate=15.02.2018, Device=W5500, HelpURL=\\cern.ch\dfs\Applications\Altium\Datasheets\W5500.pdf, LatestRevisionDate=15.02.2018, Manufacturer Part Number=W5500, Mounted=Yes, PackageDescription="QFP, 0.50mm Pitch, Square, 48 Pin, 7.00mm L X 7.00mm W X 1.60mm H Body, IPC Medium Density", Part Description="iEthernet W5500 TCP/IP Performance and High Speed SPI Ethernet Controller", Part Number=W5500, Pin Count=48, PressFit=No, Sense=No, SMD=Yes, Socket=No
J23: library part PHOENIX_1725672, "Terminal Block, 4 Positions, Screw Connection", Manufacturer="PHOENIX CONTACT", Manufacturer Part Number="1725672 (MPT 0,5/4-2,54)", Author="CERN DEM JMW", ComponentHeight=8.5mm, Component Type=Standard, CreateDate=07.11.2008, HelpURL=\\cern.ch\dfs\Applications\Altium\Datasheets\PHOENIX_1725672.pdf, LatestRevisionDate=26.04.2010, Mounted=Yes, Part Description="6A, 63V, Terminal Block, Pitch 2.54mm, 4 Positions, Screw Connection", Part Number=PHOENIX_1725672, Pin Count=4, PressFit=No, Sense=No, SMD=No, Socket=No, Status=None
J25: library part PHOENIX_1725669, "Terminal Block, 3 Positions, Screw Connection", Manufacturer="PHOENIX CONTACT", Manufacturer Part Number="1725669 (MPT 0,5/3-2,54)", Author="CERN DEM JMW", ComponentHeight=8.5mm, Component Type=Standard, CreateDate=07.11.2008, HelpURL=\\cern.ch\dfs\Applications\Altium\Datasheets\PHOENIX_1725669.pdf, LatestRevisionDate=26.04.2010, Mounted=Yes, Part Description="6A, 63V, Terminal Block, Pitch 2.54mm, 3 Positions, Screw Connection", Part Number=PHOENIX_1725669, Pin Count=3, PressFit=No, Sense=No, SMD=No, Socket=No, Status=None
J26: library part EDGE10T5B10_P200W1000L0F100X400, "PCB Edge Connector 10 (2x5)", Author="CERN DEM MR", ComponentHeight=0mm, Component Type="Standard (No BOM)", CreateDate=14.02.2018, HelpURL=\\cern.ch\dfs\Applications\Altium\Datasheets\EDGE10T5B10_P200W1000L0F100X400.pdf, LatestRevisionDate=14.02.2018, Mounted=No, Part Description="10 Contacts Board Edge Connector, Pitch 2mm, Length 0mm, Width 10mm, Finger Lenght 4mm, Finger Width 1mm", Part Number=EDGE10T5B10_P200W1000L0F100X400, Pin Count=10, PressFit=No, Sense=No, SMD=No, Socket=No, Status=None
J27 J29 J30: library part EDGE10T1B6_P200W1000L0F100X400, "PCB Edge Connector 10 (2x5)", Author="CERN DEM MR", ComponentHeight=0mm, Component Type="Standard (No BOM)", CreateDate=14.02.2018, HelpURL=\\cern.ch\dfs\Applications\Altium\Datasheets\EDGE10T1B6_P200W1000L0F100X400.pdf, LatestRevisionDate=14.02.2018, Mounted=No, Part Description="10 Contacts Board Edge Connector, Pitch 2mm, Length 0mm, Width 10mm, Finger Lenght 4mm, Finger Width 1mm", Part Number=EDGE10T1B6_P200W1000L0F100X400, Pin Count=10, PressFit=No, Sense=No, SMD=No, Socket=No, Status=None
J28: library part MOLEX_105133-0011, "5 Pin + 1 Shield USB Receptacle", Manufacturer=MOLEX, Manufacturer Part Number=105133-0011, Author="CERN DEM MR", ComponentHeight=6.7mm, Component Type=Standard, CreateDate=13.12.2017, Family=USB, HelpURL=\\cern.ch\dfs\Applications\Altium\Datasheets\MOLEX_105133-0011.pdf, LatestRevisionDate=13.12.2017, Mounted=Yes, Part Description="0.65mm Pitch, Micro-USB Type B Surface Mounte Vertical Receptacle", Part Number=MOLEX_105133-0011, Pin Count=8, PressFit=No, Sense=No, SMD=Yes, Socket=No, Status=None
J94: "MagJack 10/100BaseT, PoE+, 1X1, OG/Y, -40 to 85*C, Tab Up, RoHS", Manufacturer=Abracon, Manufacturer Part Number=ARJM11C7-114-BA-EW2, Author=GK, ComponentHeight=13.61mm, Component Type=Standard, CreateDate=05.11.2012, Family=RJ45, HelpURL=\\cern.ch\dfs\Applications\Altium\Datasheets\BELFUSE_0826-1X1T-GJ-F.pdf, LatestRevisionDate=05.11.2012, Mounted=Yes, Part Description="1 Port, Orange Green/Yellow LEDs, RJ45 10/100BaseT, PoE, Ethernet MagJack® Connector Module", Part Number=ARJM11C7-114-BA-EW2, Pin Count=18, PressFit=No, Sense=No, SMD=No, Socket=No, Status=None
JP2: library part JUMPER, "Jumper", Supplier Part Number 1=1798942, Supplier 1=Farnell
JP3: library part "CON_2x5 1.27 SMT Male", "1.27 mm dual row goldpin (Maritex)"
L1: library part IND_MURATA_DLW21SN900SQ2L, "Inductor Common Mode", Case=0805, Manufacturer=MURATA, Manufacturer Part Number=DLW21SN900SQ2L, Power=330mA, Resistance=0.35R, Tolerance=±25%, Author="CERN DEM JLC", ComponentHeight=1.4mm, Component Type=Standard, CreateDate=2014-07-01, HelpURL=\\cern.ch\dfs\Applications\Altium\Datasheets\IND_MURATA_DLW21S.pdf, LatestRevisionDate=2014-07-01, Mounted=Yes, Part Description="Wire Wound Common Mode Choke Coil (DLW21S Series)", Part Number=IND_MURATA_DLW21SN900SQ2L, Pin Count=4, SMD=Yes, Socket=No, Status=None, Table="Inductors SMD"
L3: library part IND_2.2UH_20%_MURATA_LQH44PN2R2MP0L, "Inductor With Core", Case=4040, Manufacturer=MURATA, Manufacturer Part Number=LQH44PN2R2MP0L, Power=1.8A, Resistance=0R049, Tolerance=±20%, Author="CERN DEM JLC", ComponentHeight=1.8mm, Component Type=Standard, CreateDate=14.02.2018, HelpURL=\\cern.ch\dfs\Applications\Altium\Datasheets\IND_MURATA_LQH44PN_P0.pdf, LatestRevisionDate=14.02.2018, Mounted=Yes, Part Description="Wire Wound Ferrite Inductor for Power Lines", Part Number=IND_2.2UH_20%_MURATA_LQH44PN2R2MP0L, Pin Count=2, Sense=No, SMD=Yes, Socket=No, Status=None
LD3 LD4 LD5: library part LED_KINGBRIGHT_KPTR-3216CGCK, "LED Green 1A 2C", Manufacturer=KINGBRIGHT, Manufacturer Part Number=KPTR-3216CGCK, Author="CERN DEM MR", Bonding=No, Color=Green, ComponentHeight=0.35mm, Component Type=Standard, CreateDate=15.02.2016, HelpURL=\\cern.ch\dfs\Applications\Altium\Datasheets\LED_KINGBRIGHT_KPTR-3216CGCK.pdf, LatestRevisionDate=15.02.2016, Mounted=Yes, PackageDescription="Reverse Mount LED 3216, Hole 2.1x2.3mm 0.35mm Height", Part Description="Reverse Mount LED 1.4x1.6mm Green", Part Number=LED_KINGBRIGHT_KPTR-3216CGCK, Pin Count=2, PressFit=No, Sense=No, SMD=Yes, Socket=No
PB1: library part PB_TYCO_FSMSM, "Push-Button Switch SPDT", Manufacturer="TYCO ELECTRONICS", Manufacturer Part Number="FSMSM or 1437566-3", Author="CERN DEM JLC", ComponentHeight=4.3mm, Component Type=Standard, CreateDate=30.06.2008, Family="Push Button", HelpURL=\\cern.ch\dfs\Applications\Altium\Datasheets\PB_TYCO_FSMSM.pdf, LatestRevisionDate=21.06.2012, Mounted=Yes, PackageDescription="Body 3.5x6.0mm, Pushbutton Switch,  TYCO ALCOSWITCH FSMSM Serie", Part Description="12VDC 50mA SPST Tactile  Push-Button Switch", Part Number=PB_TYCO_FSMSM, Pin Count=2, PressFit=No, Sense=No, SMD=Yes, Socket=No, Status=None
Q2: "Quartz Crystal 20MHz, 30ppm, 20pF", Manufacturer="SR PASSIVES", Manufacturer Part Number=20M-49SMD-SR, Part Number="SR PASSIVES 20M-49SMD-SR", Author=GK, Bonding=No, ComponentHeight=4.3mm, Component Type=Standard, CreateDate=19.04.2012, HelpURL=\\cern.ch\dfs\Applications\Altium\Datasheets\XTAL_IQD_LFXTAL003166.pdf, LatestRevisionDate=07.11.2016, Mounted=Yes, PackageDescription="HC49/4H SMX Case, SMD Cristal, Body 11.6x4.9mm", Part Description="Tolerance:± 30ppm, Stability:± 50ppm, -10°C to +60°C, 20pF, Surface Mount Quartz Crystal, HC49/4HSMX Series", Pin Count=2, PressFit=No, Sense=No, SMD=Yes, Socket=No
Q3: library part XTAL_32.768KHZ_ABRACON_ABS09-32.768KHZ-T, "Quartz Crystal", Manufacturer=ABRACON, Manufacturer Part Number=ABS09-32.768KHZ-T, Author="CERN DEM JLC", Bonding=No, ComponentHeight=0.9mm, Component Type=Standard, CreateDate=16.10.2014, HelpURL=\\cern.ch\dfs\Applications\Altium\Datasheets\XTAL_ABRACON_ABS09.pdf, LatestRevisionDate=16.10.2014, Mounted=Yes, PackageDescription="2 Pins, 4.1x1.5mm, SMD Low Profile Crystal, ABS09 Serie", Part Description="Tolerance: ±20ppm, Stability: ±5ppm, -40°C to +85°C, 12.5pF, SMD Low Profile Crystal, ABS09 Series", Part Number=XTAL_32.768KHZ_ABRACON_ABS09-32.768KHZ-T, Pin Count=2, PressFit=No, Sense=No, SMD=Yes, Socket=No
R12 R13 R18 R58 R64 R71 R72 R73 R492: library part R0402_1K_1%_0.0625W_100PPM, "Resistor - 1%", Case=0402, Manufacturer=GENERIC, Manufacturer1 ComponentHeight=0.4mm, Manufacturer1 Example="YAGEO PHYCOMP", Manufacturer1 Part Number=232270671002L, Power=0.0625W, Tolerance=±1%, Author="CERN DEM JLC", Component Type=Standard, CreateDate=03.12.2007, HelpURL=\\cern.ch\dfs\Applications\Altium\Datasheets\R0402_Phycomp_RC0402.pdf, LatestRevisionDate=17.10.2012, Manufacturer Part Number=R0402_1K_1%_0.0625W_100PPM, Mounted=Yes, Part Description="General Purpose Thick Film Chip Resistor", Part Number=R0402_1K_1%_0.0625W_100PPM, Pin Count=2, PressFit=No, Sense=No, SMD=Yes, Socket=No, Status="Not Recommended", TC=±100ppm/°C
R14 R59: library part RES_1206, "SMD Resistor", Supplier Part Number 1=39K0871, Supplier 1=Newark
R19 R68 R128 R129 R131 R132: library part R0402_49R9_1%_0.0625W_100PPM, "Resistor - 1%", Case=0402, Manufacturer=GENERIC, Manufacturer1 ComponentHeight=0.4mm, Manufacturer1 Example="YAGEO PHYCOMP", Manufacturer1 Part Number="232270674999L or RC0402FR-0749R9L", Power=0.0625W, Tolerance=±1%, Author="CERN DEM JLC", Component Type=Standard, CreateDate=2012-10-24, HelpURL=\\cern.ch\dfs\Applications\Altium\Datasheets\R0402_Phycomp_RC0402.pdf, LatestRevisionDate=2012-10-24, Manufacturer Part Number=R0402_49R9_1%_0.0625W_100PPM, Mounted=Yes, Part Description="General Purpose Thick Film Chip Resistor", Part Number=R0402_49R9_1%_0.0625W_100PPM, Pin Count=2, SMD=Yes, Socket=No, Status="Not recommended", Table="Resistors SMD", TC=±100ppm/°C
R20 R74: library part R0402_100K_1%_0.0625W_100PPM, "Resistor - 1%", Case=0402, Manufacturer=GENERIC, Manufacturer1 ComponentHeight=0.4mm, Manufacturer1 Example="YAGEO PHYCOMP", Manufacturer1 Part Number=232270671004L, Power=0.0625W, Tolerance=±1%, Author="CERN DEM JLC", Component Type=Standard, CreateDate=03.12.2007, HelpURL=\\cern.ch\dfs\Applications\Altium\Datasheets\R0402_Phycomp_RC0402.pdf, LatestRevisionDate=17.10.2012, Manufacturer Part Number=R0402_100K_1%_0.0625W_100PPM, Mounted=Yes, Part Description="General Purpose Thick Film Chip Resistor", Part Number=R0402_100K_1%_0.0625W_100PPM, Pin Count=2, PressFit=No, Sense=No, SMD=Yes, Socket=No, Status="Not Recommended", TC=±100ppm/°C
R56 R62 R63 R66 R67 R69 R70: library part R0402_10K_1%_0.0625W_100PPM, "Resistor - 1%", Case=0402, Manufacturer=GENERIC, Manufacturer1 ComponentHeight=0.4mm, Manufacturer1 Example="YAGEO PHYCOMP", Manufacturer1 Part Number=232270671003L, Power=0.0625W, Tolerance=±1%, Author="CERN DEM JLC", Component Type=Standard, HelpURL=\\cern.ch\dfs\Applications\Altium\Datasheets\R0402_Phycomp_RC0402.pdf, Manufacturer Part Number=R0402_10K_1%_0.0625W_100PPM, Mounted=Yes, Part Description="General Purpose Thick Film Chip Resistor", Part Number=R0402_10K_1%_0.0625W_100PPM, Pin Count=2, SMD=Yes, Socket=No, TC=±100ppm/°C
  R56: CreateDate=03.12.2007, LatestRevisionDate=17.10.2012, PressFit=No, Sense=No, Status="Not Recommended"
  R62 R63 R66 R67 R69 R70: CreateDate=2007-12-03, LatestRevisionDate=2012-10-17, Status="Not recommended", Table="Resistors SMD"
R57: library part R0402_4K7_1%_0.0625W_100PPM, "Resistor - 1%", Case=0402, Manufacturer=GENERIC, Manufacturer1 ComponentHeight=0.4mm, Manufacturer1 Example="YAGEO PHYCOMP", Manufacturer1 Part Number=232270674702L, Power=0.0625W, Tolerance=±1%, Author="CERN DEM JLC", Component Type=Standard, CreateDate=03.12.2007, HelpURL=\\cern.ch\dfs\Applications\Altium\Datasheets\R0402_Phycomp_RC0402.pdf, LatestRevisionDate=17.10.2012, Manufacturer Part Number=R0402_4K7_1%_0.0625W_100PPM, Mounted=Yes, Part Description="General Purpose Thick Film Chip Resistor", Part Number=R0402_4K7_1%_0.0625W_100PPM, Pin Count=2, PressFit=No, Sense=No, SMD=Yes, Socket=No, Status="Not Recommended", TC=±100ppm/°C
R75: library part R0402_22K_1%_0.0625W_100PPM, "Resistor - 1%", Case=0402, Manufacturer=GENERIC, Manufacturer1 ComponentHeight=0.4mm, Manufacturer1 Example="YAGEO PHYCOMP", Manufacturer1 Part Number=232270672203L, Power=0.0625W, Tolerance=±1%, Author="CERN DEM JLC", Component Type=Standard, CreateDate=03.12.2007, HelpURL=\\cern.ch\dfs\Applications\Altium\Datasheets\R0402_Phycomp_RC0402.pdf, LatestRevisionDate=17.10.2012, Manufacturer Part Number=R0402_22K_1%_0.0625W_100PPM, Mounted=Yes, Part Description="General Purpose Thick Film Chip Resistor", Part Number=R0402_22K_1%_0.0625W_100PPM, Pin Count=2, PressFit=No, Sense=No, SMD=Yes, Socket=No, Status="Not Recommended", TC=±100ppm/°C